# EAGLE board enc28j60_modul (EAGLE 5.10)
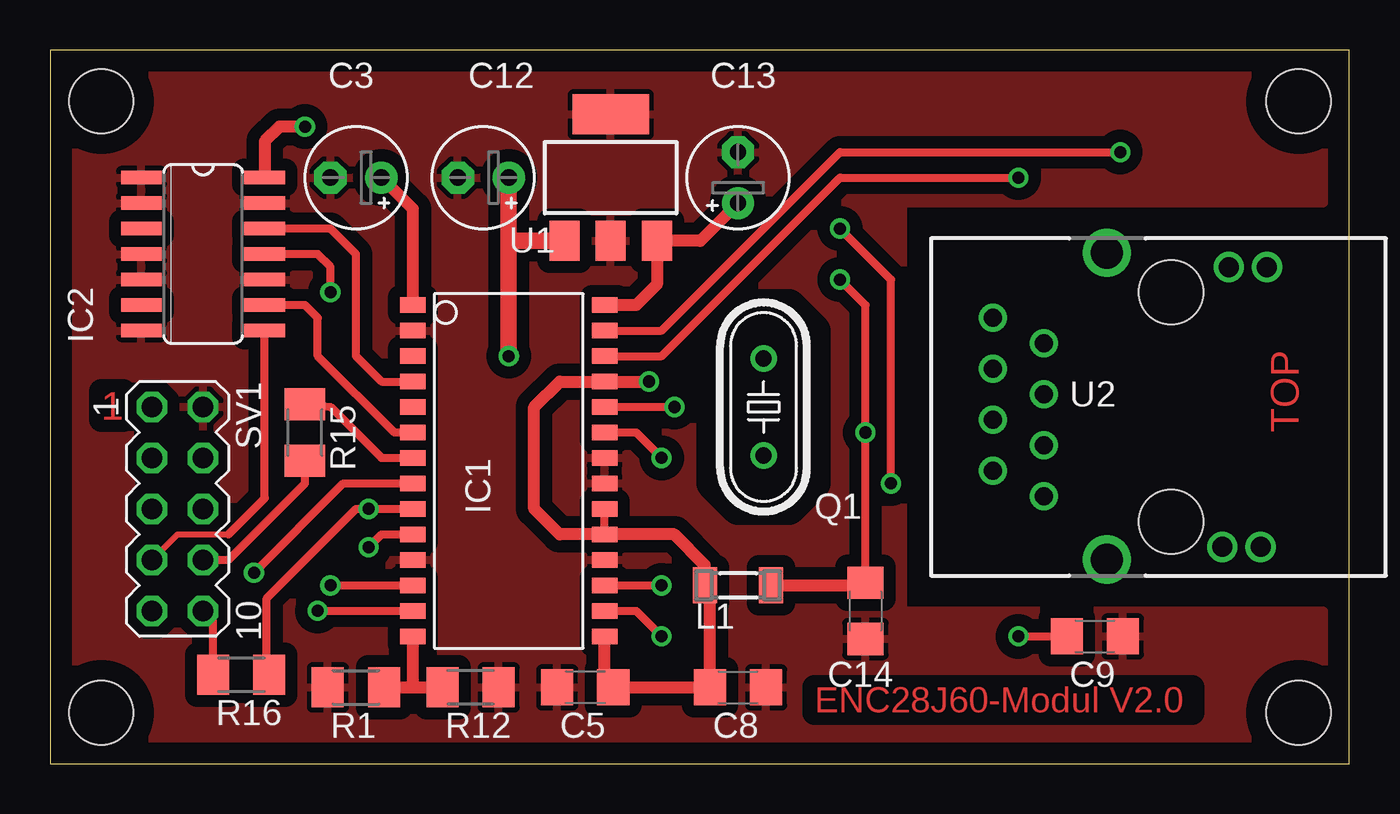
[diagram p0: board, top side]
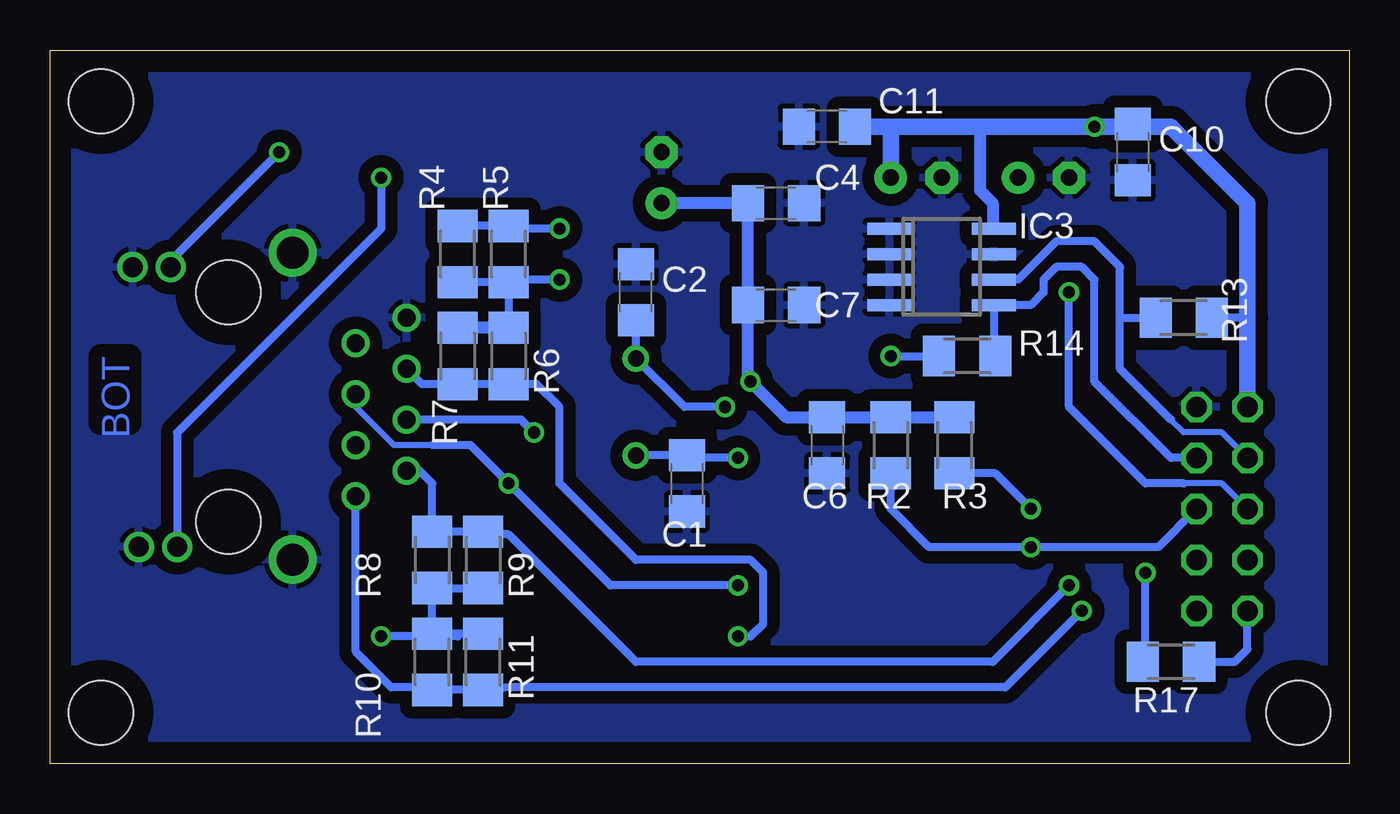
[diagram p1: board, bottom side, seen from below]

Size 64.76 x 35.55 mm. Coordinates in mm from the lower left corner, seen from the top.
Outline: 0,35.55 0,0 64.76,0 64.76,35.55 0,35.55
Copper layers (1*16): Top 0.035mm / dielectric 1.5mm / Bottom 0.035mm
Design rules "default": minimum track width 10mil, minimum drill 24mil, track to track 8mil, track to pad 8mil, pad to pad 8mil, via to via 8mil, smd to smd 8mil, copper to edge 40mil, drill to drill 8mil, minimum pad ring 10mil, minimum via ring 8mil, stop-mask expansion 4mil, vias tented up to drill 0mil, thermal gap 10mil
Holes 3.2 mm at 2.54,33.01 2.54,2.53 62.23,2.53 62.23,33.01
tRestrict: area 33,12.7 to 38.1,22.8

## Footprints (pad centres in the part's own frame; a part is rotated, then mirrored left to right if it is on the bottom)
C1206 = smd 1.6 x 1.8: 1 -1.4,0; 2 1.4,0
E2,5-5 = drill 0.813 pad 1.6 round: + -1.27,0 | drill 0.813 pad 1.6 octagon: - 1.27,0
SO28W = smd 0.762 x 1.27: 1 -7.62,-4.78; 2 -6.35,-4.78; 3 -5.08,-4.78; 4 -3.81,-4.78; 5 -2.54,-4.78; 6 -1.27,-4.78; 7 0,-4.78; 8 1.27,-4.78; 9 2.54,-4.78; 10 3.81,-4.78; 11 5.08,-4.78; 12 6.35,-4.78; 13 7.62,-4.78; 14 8.89,-4.78; 15 8.89,4.78; 16 7.62,4.78; 17 6.35,4.78; 18 5.08,4.78; 19 3.81,4.78; 20 2.54,4.78; 21 1.27,4.78; 22 0,4.78; 23 -1.27,4.78; 24 -2.54,4.78; 25 -3.81,4.78; 26 -5.08,4.78; 27 -6.35,4.78; 28 -7.62,4.78
SO14 = smd 0.66 x 2.032: 1 -3.81,-3.073; 2 -2.54,-3.073; 3 -1.27,-3.073; 4 0,-3.073; 5 1.27,-3.073; 6 2.54,-3.073; 7 3.81,-3.073; 8 3.81,3.073; 9 2.54,3.073; 10 1.27,3.073; 11 0,3.073; 12 -1.27,3.073; 13 -2.54,3.073; 14 -3.81,3.073
SO-08 = smd 0.6 x 2.2: 1 -1.905,-2.6; 2 -0.635,-2.6; 3 0.635,-2.6; 4 1.905,-2.6; 5 1.905,2.6; 6 0.635,2.6; 7 -0.635,2.6; 8 -1.905,2.6
SM-1206 = smd 1.2 x 1.8: 1 -1.65,0; 2 1.65,0
HC49/S = drill 0.813 round: 1 -2.413,0; 2 2.413,0
M1206 = smd 1.6 x 2: 1 -1.4,0; 2 1.4,0
MA05-2 = drill 1.016 octagon: 1 -5.08,-1.27; 2 -5.08,1.27; 3 -2.54,-1.27; 4 -2.54,1.27; 5 0,-1.27; 6 0,1.27; 7 2.54,-1.27; 8 2.54,1.27; 9 5.08,-1.27; 10 5.08,1.27
SOT223 = smd 1.5 x 2: 1 -3.57,-3.15; 2 -1.27,-3.15; 3 1.03,-3.15 | smd 3.8 x 2: 4 -1.27,3.15
5-6605758-1 = drill 0.9 pad 1.3 round: 1 -4.445,0; 2 -3.175,2.54; 3 -1.905,0; 4 -0.635,2.54; 5 0.635,0; 6 1.905,2.54; 7 3.175,0; 8 4.445,2.54 | drill 1 pad 1.422 round: D1 -6.973,-8.902; D2 -6.973,-10.807; D3 6.973,-9.219; D4 6.973,-11.124 | drill 1.6 pad 2.184 round: M1 7.683,-3.141; M2 -7.603,-3.141 | hole 3.2: 5.715,-6.35; -5.715,-6.35

## Placement (x,y rotation side)
C1  22p  [C1206]  33.02,13.96 270 bottom
C2  22p  [C1206]  35.56,23.48 90 bottom
C3  10u  [E2,5-5]  15.24,29.2 180 top
C4  100n  [C1206]  28.57,27.93 0 bottom
C5  100n  [C1206]  26.67,3.8 180 top
C6  100n  [C1206]  26.04,15.86 270 bottom
C7  100n  [C1206]  28.57,22.85 0 bottom
C8  100n  [C1206]  34.29,3.8 0 top
C9  10n  [C1206]  52.07,6.34 0 top
C10  100n  [C1206]  10.79,30.47 270 bottom
C11  100n  [C1206]  26.04,31.74 180 bottom
C12  10u  [E2,5-5]  21.59,29.2 180 top
C13  10u  [E2,5-5]  34.29,29.2 90 top
C14  100n  [C1206]  40.64,7.61 270 top
IC1  ENC28J60SO  [SO28W]  22.86,15.23 270 top
IC2  74ACT125D  [SO14]  7.62,25.39 270 top
IC3  24LC128SN  [SO-08]  20.32,24.75 270 bottom
L1  Ferrit Bead  [SM-1206]  34.29,8.88 180 top
Q1  25MHz  [HC49/S]  35.56,17.77 90 top
R1  2k7  [M1206]  15.24,3.8 180 top
R2  10k  [M1206]  22.86,15.86 90 bottom
R3  10k  [M1206]  19.68,15.86 90 bottom
R4  100R  [M1206]  44.45,25.39 270 bottom
R5  100R  [M1206]  41.91,25.39 270 bottom
R6  100R  [M1206]  41.91,20.31 90 bottom
R7  100R  [M1206]  44.45,20.31 90 bottom
R8  100R  [M1206]  45.72,10.15 90 bottom
R9  100R  [M1206]  43.18,10.15 90 bottom
R10  100R  [M1206]  45.72,5.07 270 bottom
R11  100R  [M1206]  43.18,5.07 270 bottom
R12  15k  [M1206]  20.95,3.8 0 top
R13  10k  [M1206]  8.26,22.21 0 bottom
R14  10k  [M1206]  19.05,20.31 0 bottom
R15  100R  [M1206]  12.7,16.5 270 top
R16  100R  [M1206]  9.53,4.43 180 top
R17  100R  [M1206]  8.89,5.07 0 bottom
SV1  [MA05-2]  6.35,12.69 270 top
U1  TC1262-33VDB  [SOT223]  29.21,29.2 0 top
U2  Tyco 5-6605758-1  [5-6605758-1]  49.53,17.77 90 top

## Library data of the parts
C1-C14 R1-R17 = rcl
IC1 = microchip-6
IC2 = 74xx-eu
IC3 = microchip
L1 = inductor-neosid
Q1 = crystal
SV1 = con-lstb
U1 = v-reg-misc
U2 = con-tycoelectronics-1

## Nets
+3V3: C4.1 C5.1 C6.1 C7.1 C8.1 C13.+ IC1.15 IC1.19 IC1.20 IC1.25 IC1.28 L1.2 R2.2 R3.2 U1.3
+5V: C10.1 C11.1 C12.+ IC2.14 IC3.8 R13.2 R14.1 SV1.1 U1.1
CS: R16.2 SV1.10
GND: C1.2 C2.2 C3.- C4.2 C5.2 C6.2 C7.2 C8.2 C9.2 C10.2 C11.2 C12.- C13.- C14.2 IC1.2 IC1.11 IC1.18 IC1.21 IC1.22 IC2.1 IC2.2 IC2.4 IC2.5 IC2.7 IC2.10 IC2.13 IC3.1 IC3.2 IC3.3 IC3.4 IC3.7 R1.2 R12.2 SV1.2 U1.2 U1.4 U2.8 U2.D2 U2.D4 U2.M1 U2.M2
INT: IC2.11 SV1.5
INT_3V3: IC1.4 IC2.12
LEDA: IC1.27 U2.D3
LEDB: IC1.26 U2.D1
N$1: C1.1 IC1.23 Q1.1
N$2: C2.1 IC1.24 Q1.2
N$3: C3.+ IC1.1
N$4: IC1.7 R15.1
N$5: IC1.14 R1.1 R12.1
N$6: C14.1 L1.1 R4.2 R5.2 R6.2 R7.2 U2.4
N$7: IC1.9 R3.1 R16.1
N$8: IC1.8 R17.1
N$13: C9.1 R8.1 R9.1 R10.1 R11.1
RST: IC1.10 R2.1 SV1.6
SCK: R17.2 SV1.9
SCL: IC3.6 R13.1 SV1.3
SDA: IC3.5 R14.2 SV1.4
SI: R15.2 SV1.8
SO: IC2.8 SV1.7
SO_3V3: IC1.6 IC2.9
TPIN+: IC1.13 R10.2 R11.2 U2.1
TPIN-: IC1.12 R8.2 R9.2 U2.2
TPOUT+: IC1.17 R4.1 R5.1 U2.5
TPOUT-: IC1.16 R6.1 R7.1 U2.6

## Tracks (layer width: path | path; a pad name or v marks a point on that pad's centre or on a via)
+3V3  (via drill 0.6)
  Top 0.406: 27.64,4.23 arc90 C5.1 | 32.89,8.63 L1.2 | IC1.19 IC1.20
  Top 0.61: v29.84,19.04 IC1.25 25.4,19.04 24.13,17.77 24.13,12.69 25.4,11.42 IC1.19 31.11,11.42 32.64,9.89 L1.2 | 27.64,4.23 IC1.15 | C13.+ 32.41,26.05 U1.3 30.24,23.88 29.21,22.85 IC1.28 | 32.89,8.63 C8.1 C5.1
  Bottom 0.61: R3.2 R2.2 C6.1 28.07,17.26 v29.84,19.04 29.98,19.04 C7.1 C4.1 C13.+
+5V  (via drill 0.6)
  Top 0.61: IC2.14 10.69,31 11.43,31.74 v12.7,31.74
  Top 0.813: 22.86,26.02 v22.86,20.31 | C12.+ 22.86,26.02 | U1.1 22.89,26.05 22.86,26.02
  Bottom 0.406: 5.08,20.88 5.08,22.21 R13.2 | 17.78,26.72 IC3.8 | v22.86,20.31 R14.1
  Bottom 0.61: 17.78,26.72 17.78,27.93 18.41,28.56 18.41,31.74
  Bottom 0.813: SV1.1 5.08,22.21 5.08,27.93 8.89,31.74 10.16,31.74 C10.1 10.29,31.74 v12.7,31.74 18.41,31.74 22.86,31.74 | 22.86,31.74 C11.1 | 22.86,31.74 C12.+
CS
  Top 0.406: R16.2 8.12,7.1 SV1.10
GND
  pour Top (isolate 0.61): 63.5,34.28 1.27,34.28 1.27,1.26 63.5,1.26 63.5,7.61 42.55,7.61 42.55,27.93 63.5,27.93
  pour Bottom (isolate 0.61): 63.5,34.28 1.27,34.28 1.27,1.26 63.5,1.26
INT  (via drill 0.6)
  Top 0.406: v13.97,23.48 13.97,24.75 13.34,25.39 IC2.11
  Bottom 0.305: SV1.5 6.35,13.96 8.26,13.96
  Bottom 0.406: v13.97,23.48 13.97,17.77 10.16,13.96 8.26,13.96
INT_3V3
  Top 0.406: IC1.4 16.51,19.04 15.24,20.31 15.24,25.39 13.97,26.66 IC2.12
LEDA  (via drill 0.6)
  Top 0.406: v53.34,30.47 39.37,30.47 30.48,21.58 IC1.27
  Bottom 0.406: v53.34,30.47 58.75,25.06 U2.D3
LEDB  (via drill 0.6)
  Top 0.406: v48.26,29.2 39.37,29.2 30.48,20.31 IC1.26
  Bottom 0.406: v48.26,29.2 48.26,26.66 58.43,16.49 U2.D1
N$1  (via drill 0.6)
  Top 0.406: IC1.23 29.21,16.5 v30.48,15.23
  Bottom 0.406: v30.48,15.23 32.89,15.23 C1.1 Q1.1
N$2  (via drill 0.6)
  Top 0.406: IC1.24 v31.11,17.77
  Bottom 0.406: C2.1 Q1.2 33.15,17.77 v31.11,17.77
N$3
  Top 0.61: IC1.1 18.08,27.63 C3.+
N$4
  Top 0.406: R15.1 13.97,17.77 16.51,15.23 IC1.7
N$5
  Top 0.61: R1.1 18.08,3.8 | 18.08,3.8 IC1.14 | 18.08,3.8 R12.1
N$6  (via drill 0.6)
  Top 0.406: C14.1 v40.64,16.5 40.64,22.85 v39.37,24.12
  Top 0.61: C14.1 40.51,8.88 L1.1
  Bottom 0.406: R5.2 R4.2 | U2.4 41.27,17.13 v40.64,16.5 | v39.37,24.12 41.91,24.12 R5.2 | R5.2 R6.2
  Bottom 0.61: R6.2 R7.2
N$7  (via drill 0.6)
  Top 0.406: IC1.9 v15.88,12.69 15.24,12.69 10.79,8.24 10.79,4.56 R16.1
  Bottom 0.406: v15.88,12.69 17.65,14.46 R3.1
N$8  (via drill 0.6)
  Top 0.406: IC1.8 14.61,13.96 v10.16,9.51
  Bottom 0.406: 10.29,9.38 v10.16,9.51 10.16,5.2 R17.1
N$13  (via drill 0.6)
  Top 0.406: v48.26,6.34 C9.1
  Bottom 0.406: R11.1 R10.1 | R9.1 R8.1 R10.1 | v48.26,6.34 44.45,6.34 R10.1
RST  (via drill 0.6)
  Top 0.406: v15.88,10.78 16.51,11.42 IC1.10
  Bottom 0.406: SV1.6 9.53,10.78 v15.88,10.78 20.95,10.78 22.86,12.69 R2.1
SCK
  Bottom 0.406: R17.2 5.71,5.07 5.08,5.7 SV1.9
SCL
  Bottom 0.305: 8.89,17.13 8.26,16.5 6.35,16.5 SV1.3
  Bottom 0.406: IC3.6 16.51,24.12 14.61,26.02 12.7,26.02 11.43,24.75 11.43,22.21 | 11.43,22.21 11.43,19.67 8.89,17.13 | 11.43,22.21 R13.1
SDA
  Bottom 0.406: SV1.4 8.89,15.23 12.7,19.04 12.7,24.12 13.34,24.75 14.61,24.75 15.24,24.12 15.24,23.48 15.88,22.85 IC3.5 17.72,20.31 R14.2
SI
  Top 0.406: SV1.8 8.89,10.15 12.7,13.96 R15.2
SO
  Top 0.305: 8.89,11.42 6.35,11.42 SV1.7
  Top 0.406: IC2.8 10.69,13.22 8.89,11.42
SO_3V3
  Top 0.406: IC1.6 17.14,16.5 13.34,20.31 13.34,22.21 12.7,22.85 IC2.9
TPIN+  (via drill 0.6)
  Top 0.406: v13.34,7.61 IC1.13
  Bottom 0.406: v13.34,7.61 17.14,3.8 41.78,3.8 R11.2 R10.2 45.85,3.8 47.76,3.8 49.53,5.57 U2.1
TPIN-  (via drill 0.6)
  Top 0.406: v13.97,8.88 IC1.12
  Bottom 0.406: v13.97,8.88 17.78,5.07 35.56,5.07 41.91,11.42 43.05,11.42 R9.2 R8.2 45.72,13.96 46.35,14.59 U2.2
TPOUT+  (via drill 0.6)
  Top 0.406: IC1.17 v30.48,8.88 | v41.91,13.96 41.91,24.12 v39.37,26.66
  Bottom 0.305: U2.5 49.53,17.77 47.62,15.86 45.72,15.86
  Bottom 0.406: R4.1 R5.1 41.78,26.66 v39.37,26.66 | v30.48,8.88 36.83,8.88 v41.91,13.96 43.81,15.86 45.72,15.86
TPOUT-  (via drill 0.6)
  Top 0.406: IC1.16 29.21,7.61 v30.48,6.34
  Bottom 0.406: v30.48,6.34 29.84,6.34 29.21,6.97 29.21,9.51 29.84,10.15 35.56,10.15 39.37,13.96 39.37,17.77 40.51,18.91 R6.1 R7.1 46.23,18.91 U2.6

## Text on the board
Top: 1 | TOP | ENC28J60-Modul V2.0
Bottom: BOT